# Altium PCB GC-Pcb.PcbDoc (part 2 of 3)
Units mm, origin at the board's own origin, x right, y up, seen from the top; angles counter-clockwise.
Board outline 75 x 40 mm, 4 copper layers (Top Copper, GND, PWR, Bottom Copper), stack 1.312 mm thick; 83 components, 62 nets, 306 pads, 137 vias.
Unrouted connection lines stored in the file: 2.
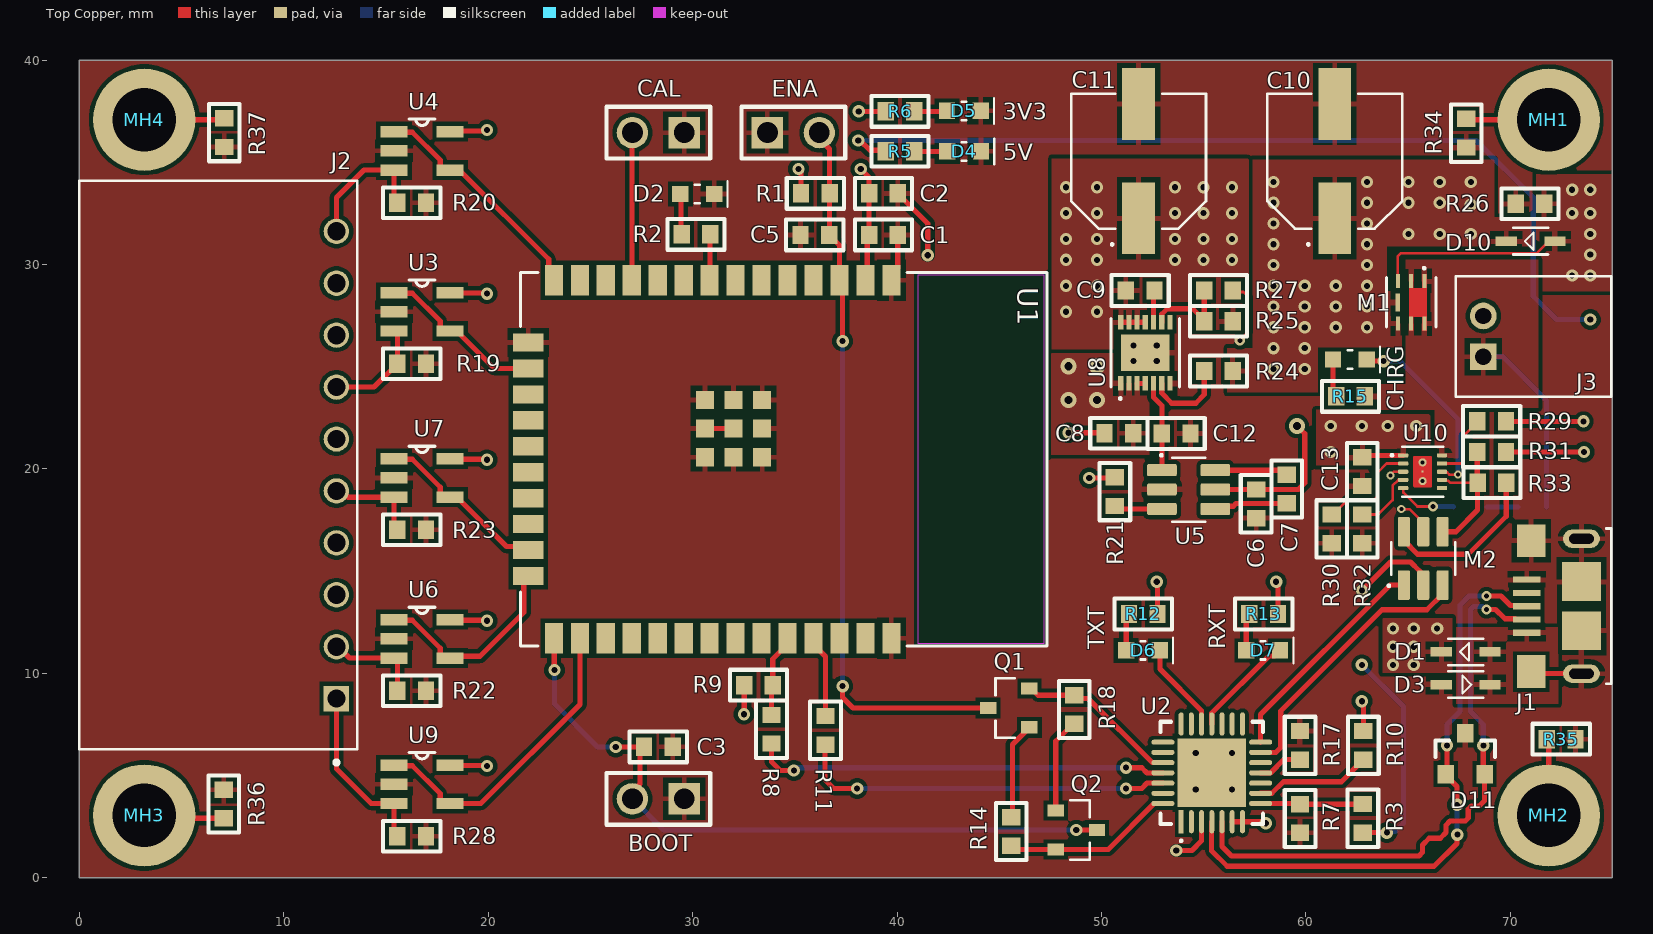
[diagram p0: Top Copper view]

## Part data (continued)
D11: library part D-SM05T1G, "Trans Voltage Suppressor Diode, 300W, 5V V(RWM), Unidirectional, 2 Element, Silicon, TO-236AB", Breakdown Voltage-Nom=6.7V, Clamping Voltage-Max=9.8V, Manufacturer="ON Semiconductor", Max Breakdown Voltage=7.3V, Max Operating Temperature=150°C, Max Power Dissipation=225mW, Min Breakdown Voltage=6.2V, Min Operating Temperature=-55°C, Non-rep Peak Rev Power Dis-Max=300W, Package Body Material=Plastic, Package Shape=Rectangular, Package Style="SMALL OUTLINEMeter", Peak Reflow Temperature (Cel)=260°C, Rep Pk Reverse Voltage-Max=5V, Supplier Part Number 1=4992673, Time @ Peak Reflow Temperature-Max (s)=40s, Category="ESD and Circuit Protection ICs", ComponentLink1description=https://datasheet.ciiva.com:443/pdfs/VipMasterIC/IC/ONSM/ONSM-S-A0006325830/ONSM-S-A0006325830-1.pdf?src-supplier=IHS+Markit, ComponentLink1URL=https://datasheet.ciiva.com:443/pdfs/VipMasterIC/IC/ONSM/ONSM-S-A0006325830/ONSM-S-A0006325830-1.pdf?src-supplier=IHS+Markit, ComponentLink2description=https://datasheet.ciiva.com/11193/sm12t1-d-11193492.pdf?src-supplier=Avnet, ComponentLink2URL=https://datasheet.ciiva.com/11193/sm12t1-d-11193492.pdf?src-supplier=Avnet, ComponentLink3Description=https://datasheet.ciiva.com/4508/sm12t1-d-196357-4508787.pdf?src-supplier=Mouser, ComponentLink3URL=https://datasheet.ciiva.com/4508/sm12t1-d-196357-4508787.pdf?src-supplier=Mouser, ComponentLink4Description=https://datasheet.ciiva.com/15143/getdatasheetpartid-69008-15143230.pdf?src-supplier=Verical, ComponentLink4URL=https://datasheet.ciiva.com/15143/getdatasheetpartid-69008-15143230.pdf?src-supplier=Verical, ComponentLink5Description=https://datasheet.ciiva.com/22661/1708353-22661174.pdf?src-supplier=Element14, ComponentLink5URL=https://datasheet.ciiva.com/22661/1708353-22661174.pdf?src-supplier=Element14, ComponentLink6Description=https://datasheet.ciiva.com/16199/sm12t1-d-16199269.pdf?src-supplier=Future+Electronics, ComponentLink6URL=https://datasheet.ciiva.com/16199/sm12t1-d-16199269.pdf?src-supplier=Future+Electronics, ComponentLink7Description=https://datasheet.ciiva.com/11193/sm12t1-d-11193495.pdf?src-supplier=Avnet, ComponentLink7URL=https://datasheet.ciiva.com/11193/sm12t1-d-11193495.pdf?src-supplier=Avnet, ComponentLink8Description=https://datasheet.ciiva.com/339/sm05t1-d-339929.pdf?src-supplier=Digikey, ComponentLink8URL=https://datasheet.ciiva.com/339/sm05t1-d-339929.pdf?src-supplier=Digikey, ComponentLink9Description=https://datasheet.ciiva.com/339/sm05t1-d-339930.pdf?src-supplier=Digikey, ComponentLink9URL=https://datasheet.ciiva.com/339/sm05t1-d-339930.pdf?src-supplier=Digikey, ComponentLink10Description=https://datasheet.ciiva.com/339/sm05t1-d-339928.pdf?src-supplier=Digikey, ComponentLink10URL=https://datasheet.ciiva.com/339/sm05t1-d-339928.pdf?src-supplier=Digikey, Diode Element Material=SILICON, Diode Type="TRANS VOLTAGE SUPPRESSOR", JEDEC-95 Code=TO-236AB, JESD-30 Code=R-PDSO-G3, JESD-609 Code=e3, Manufacturer Part Number=SM05T1G, Moisture Sensitivity Level=1, Number of Elements=2, Number of Pins=3, Polarity=Unidirectional, Pricing="3000=0.0553, 9000=0.0532, 15000=0.0523, 45000=0.0503, 75000=0.0486 (USD)", Qualification Status="Not Qualified", Reach SVHC Compliant=Yes, Reference Standard=IEC-61000-4-2, RoHS=Yes, RoHS Compliant=Yes, Stock=120000, Supplier 1="Future Electronics", Surface Mount=Yes, Technology=AVALANCHE, Terminal Finish=Tin, Terminal Form="Gull Wing", Terminal Position=DUAL
J1: library part J-10118193-0001LF, "FCI Right Angle Surface Mount Mount Female USB Connector; 100 V ac; 1.8A", Manufacturer="Amphenol ICC / FCI", Supplier Part Number 1=67T2259, Category="USB Connectors", ComponentLink1description=http://uk.rs-online.com/webdocs/1450/0900766b814507f1.pdf?src-supplier=Rs, ComponentLink1URL=http://uk.rs-online.com/webdocs/1450/0900766b814507f1.pdf?src-supplier=Rs, ComponentLink2description=https://cdn.amphenol-icc.com/media/wysiwyg/files/documentation/datasheet/inputoutput/io_usb_micro.pdf?src-supplier=Avnet, ComponentLink2URL=https://cdn.amphenol-icc.com/media/wysiwyg/files/documentation/datasheet/inputoutput/io_usb_micro.pdf?src-supplier=Avnet, ComponentLink3Description=https://cdn.amphenol-icc.com/media/wysiwyg/files/documentation/datasheet/inputoutput/io_usb_micro.pdf?src-supplier=Digikey, ComponentLink3URL=https://cdn.amphenol-icc.com/media/wysiwyg/files/documentation/datasheet/inputoutput/io_usb_micro.pdf?src-supplier=Digikey, ComponentLink4Description=https://datasheet.octopart.com/10118193-0001LF-Amphenol-Communications-Solutions-datasheet-96019471.pdf?src-supplier=Element14, ComponentLink4URL=https://datasheet.octopart.com/10118193-0001LF-Amphenol-Communications-Solutions-datasheet-96019471.pdf?src-supplier=Element14, ComponentLink5Description=https://cdn.amphenol-icc.com/media/wysiwyg/files/documentation/datasheet/inputoutput/io_usb_micro.pdf?src-supplier=Arrow+Electronics, ComponentLink5URL=https://cdn.amphenol-icc.com/media/wysiwyg/files/documentation/datasheet/inputoutput/io_usb_micro.pdf?src-supplier=Arrow+Electronics, ComponentLink6Description=https://cdn.amphenol-icc.com/media/wysiwyg/files/documentation/datasheet/inputoutput/io_usb_micro.pdf?src-supplier=Rs, ComponentLink6URL=https://cdn.amphenol-icc.com/media/wysiwyg/files/documentation/datasheet/inputoutput/io_usb_micro.pdf?src-supplier=Rs, ComponentLink7Description=https://cdn.amphenol-icc.com/media/wysiwyg/files/documentation/datasheet/inputoutput/io_usb_micro.pdf?src-supplier=Mouser, ComponentLink7URL=https://cdn.amphenol-icc.com/media/wysiwyg/files/documentation/datasheet/inputoutput/io_usb_micro.pdf?src-supplier=Mouser, ComponentLink8Description=https://cdn.amphenol-icc.com/media/wysiwyg/files/documentation/datasheet/inputoutput/io_usb_micro.pdf?src-supplier=Allied+Electronics, ComponentLink8URL=https://cdn.amphenol-icc.com/media/wysiwyg/files/documentation/datasheet/inputoutput/io_usb_micro.pdf?src-supplier=Allied+Electronics, ComponentLink9Description=http://www.amphenol-icc.com/media/wysiwyg/files/drawing/10118193.pdf?src-supplier=Digikey, ComponentLink9URL=http://www.amphenol-icc.com/media/wysiwyg/files/drawing/10118193.pdf?src-supplier=Digikey, ComponentLink10Description=https://cdn.amphenol-icc.com/media/wysiwyg/files/documentation/datasheet/inputoutput/io_usb_micro.pdf?src-supplier=Verical, ComponentLink10URL=https://cdn.amphenol-icc.com/media/wysiwyg/files/documentation/datasheet/inputoutput/io_usb_micro.pdf?src-supplier=Verical, ComponentLink11Description=https://cdn.amphenol-icc.com/media/wysiwyg/files/documentation/datasheet/inputoutput/io_usb_micro.pdf?src-supplier=Onlinecomponents.com, ComponentLink11URL=https://cdn.amphenol-icc.com/media/wysiwyg/files/documentation/datasheet/inputoutput/io_usb_micro.pdf?src-supplier=Onlinecomponents.com, ComponentLink12Description=https://datasheet.octopart.com/10118193-0001LF-Amphenol-Communications-Solutions-datasheet-55953155.pdf?src-supplier=TME, ComponentLink12URL=https://datasheet.octopart.com/10118193-0001LF-Amphenol-Communications-Solutions-datasheet-55953155.pdf?src-supplier=TME, ComponentLink13Description=https://cdn.amphenol-icc.com/media/wysiwyg/files/documentation/datasheet/inputoutput/io_usb_micro.pdf?src-supplier=TTI, ComponentLink13URL=https://cdn.amphenol-icc.com/media/wysiwyg/files/documentation/datasheet/inputoutput/io_usb_micro.pdf?src-supplier=TTI, ComponentLink14Description=https://datasheet.octopart.com/10118193-0001LF-Amphenol-Communications-Solutions-datasheet-11792339.pdf?src-supplier=Electro+Sonic, ComponentLink14URL=https://datasheet.octopart.com/10118193-0001LF-Amphenol-Communications-Solutions-datasheet-11792339.pdf?src-supplier=Electro+Sonic, ComponentLink15Description=https://cdn.amphenol-icc.com/media/wysiwyg/files/documentation/datasheet/inputoutput/io_usb_micro.pdf?src-supplier=Heilind+Electronics, ComponentLink15URL=https://cdn.amphenol-icc.com/media/wysiwyg/files/documentation/datasheet/inputoutput/io_usb_micro.pdf?src-supplier=Heilind+Electronics, Manufacturer Part Number=10118193-0001LF, Pricing="1=0.466, 25=0.361, 100=0.326, 250=0.312, 500=0.299 (USD)", RoHS=No, Stock=12269, Supplier 1=Avnet
J2: library part J-105314-1110, "Rectangular Power Connector, 10 Contact(s), Male, Solder Terminal", Manufacturer=Molex, Supplier Part Number 1=538-105314-1110, Category="Headers and Wire Housings", ComponentLink1description=https://www.molex.com:443/molex/products/datasheet.jsp?part=active%2f1053141110_PCB_HEADERS.xml&src-supplier=IHS+Markit, ComponentLink1URL=https://www.molex.com:443/molex/products/datasheet.jsp?part=active%2f1053141110_PCB_HEADERS.xml&src-supplier=IHS+Markit, ComponentLink2description=https://www.molex.com/pdm_docs/ps/PS-105300-100-001.pdf?src-supplier=Digikey, ComponentLink2URL=https://www.molex.com/pdm_docs/ps/PS-105300-100-001.pdf?src-supplier=Digikey, Connector Type=Power,Rectangular, Manufacturer Part Number=105314-1110, Pricing="1=2.31, 10=1.96, 50=1.96, 100=1.72, 1000=1.37, 10000=1.2 (USD)", Reach SVHC Compliant=Yes, RoHS=Yes, RoHS Compliant=Yes, Stock=2000, Supplier 1=Mouser
J3: library part J-S2B-PH-K-S(LF)(SN), "Header for PCB; pitch 2.00mm; 2-contacts; THT; male; side entry; 100V/2A", Manufacturer=JST, Manufacturer Part Number=S2B-PH-K-S(LF)(SN), Category="Headers and Wire Housings", ComponentLink1description=https://datasheet.ciiva.com/11747/0900766b8082f558-11747128.pdf?src-supplier=Rs, ComponentLink1URL=https://datasheet.ciiva.com/11747/0900766b8082f558-11747128.pdf?src-supplier=Rs, ComponentLink2description=https://datasheet.ciiva.com/712/eph-712447.pdf?src-supplier=Digikey, ComponentLink2URL=https://datasheet.ciiva.com/712/eph-712447.pdf?src-supplier=Digikey, ComponentLink3Description=https://datasheet.ciiva.com/16484/s2b-ph-k-slfsn-16484405.pdf?src-supplier=Future+Electronics, ComponentLink3URL=https://datasheet.ciiva.com/16484/s2b-ph-k-slfsn-16484405.pdf?src-supplier=Future+Electronics, ComponentLink4Description=https://datasheet.ciiva.com/8052/80564-8052207.pdf?src-supplier=Element14, ComponentLink4URL=https://datasheet.ciiva.com/8052/80564-8052207.pdf?src-supplier=Element14, ComponentLink5Description=https://datasheet.ciiva.com/26894/getdatasheetpartid-641020-26894599.pdf?src-supplier=Verical, ComponentLink5URL=https://datasheet.ciiva.com/26894/getdatasheetpartid-641020-26894599.pdf?src-supplier=Verical, Pricing="1=0.1318, 10=0.1056, 25=0.1046, 50=0.1034, 100=0.0672, 1000=0.0499 (USD)", RoHS=Yes, Stock=48365, Supplier 1="Arrow Electronics", Supplier Part Number 1=S2B-PH-K-S(LF)(SN)
M1: library part M-SIA427ADJ-T1-GE3, "Power Field-Effect Transistor, 12A I(D), 8V, 0.016ohm, 1-Element, P-Channel, Silicon, Metal-oxide Semiconductor FET", Drain Current-Max (Abs) (ID)=12A, Manufacturer="Vishay Siliconix", Max Operating Temperature=150°C, Power Dissipation-Max (Abs)=19W, Supplier Part Number 1=78-SIA427ADJ-T1-GE3, Category=MOSFETs, ComponentLink1description=https://datasheet.ciiva.com:443/pdfs/VipMasterIC/IC/VISH/VISH-S-A0001142626/VISH-S-A0001142626-1.pdf?src-supplier=IHS+Markit, ComponentLink1URL=https://datasheet.ciiva.com:443/pdfs/VipMasterIC/IC/VISH/VISH-S-A0001142626/VISH-S-A0001142626-1.pdf?src-supplier=IHS+Markit, ComponentLink2description=http://www.farnell.com/datasheets/2614535.pdf?src-supplier=Farnell, ComponentLink2URL=http://www.farnell.com/datasheets/2614535.pdf?src-supplier=Farnell, ComponentLink3Description=http://www.mouser.com/ds/2/427/sia427adj-537173.pdf?src-supplier=Mouser, ComponentLink3URL=http://www.mouser.com/ds/2/427/sia427adj-537173.pdf?src-supplier=Mouser, ComponentLink4Description=http://www.vishay.com/docs/63651/sia427adj.pdf?src-supplier=Digikey, ComponentLink4URL=http://www.vishay.com/docs/63651/sia427adj.pdf?src-supplier=Digikey, ComponentLink5Description=http://www.vishay.com/docs/63651/sia427adj.pdf?src-supplier=Avnet, ComponentLink5URL=http://www.vishay.com/docs/63651/sia427adj.pdf?src-supplier=Avnet, ComponentLink6Description=http://www.farnell.com/datasheets/2614535.pdf?src-supplier=Element14, ComponentLink6URL=http://www.farnell.com/datasheets/2614535.pdf?src-supplier=Element14, ComponentLink7Description=http://www.farnell.com/datasheets/2614535.pdf?src-supplier=Newark, ComponentLink7URL=http://www.farnell.com/datasheets/2614535.pdf?src-supplier=Newark, FET Technology="METAL-OXIDE SEMICONDUCTOR", JESD-609 Code=e3, Manufacturer Part Number=SIA427ADJ-T1-GE3, Polarity/Channel Type=P-CHANNEL, Pricing="1=0.53, 10=0.455, 50=0.455, 100=0.34, 1000=0.207, 10000=0.158 (USD)", Reach SVHC Compliant=Yes, RoHS=Yes, RoHS Compliant=Yes, Stock=63429, Supplier 1=Mouser, Surface Mount=Yes, Terminal Finish=Tin
M2: library part M-FDC6561AN, "Small Signal Field-Effect Transistor, 2.5A I(D), 30V, 2-Element, N-Channel, Silicon, Metal-oxide Semiconductor FET", Drain Current-Max (Abs) (ID)=2.5A, Drain-source On Resistance-Max=95mR, DS Breakdown Voltage-Min=30V, Manufacturer="ON Semiconductor / Fairchild", Max Operating Temperature=150°C, Operating Mode="ENHANCEMENT MODE", Package Body Material=Plastic, Package Shape=Rectangular, Package Style="SMALL OUTLINEMeter", Power Dissipation-Max (Abs)=960mW, Supplier Part Number 1=1119379, Category=MOSFETs, ComponentLink1description=https://datasheet.ciiva.com:443/pdfs/VipMasterIC/IC/ONSM/ONSM-S-A0003579719/ONSM-S-A0003579719-1.pdf?src-supplier=IHS+Markit, ComponentLink1URL=https://datasheet.ciiva.com:443/pdfs/VipMasterIC/IC/ONSM/ONSM-S-A0003579719/ONSM-S-A0003579719-1.pdf?src-supplier=IHS+Markit, ComponentLink2description=https://datasheet.ciiva.com/1252/11844-1252600.pdf?src-supplier=Newark, ComponentLink2URL=https://datasheet.ciiva.com/1252/11844-1252600.pdf?src-supplier=Newark, ComponentLink3Description=https://datasheet.ciiva.com/928/fdc6561an-928038.pdf?src-supplier=Digikey, ComponentLink3URL=https://datasheet.ciiva.com/928/fdc6561an-928038.pdf?src-supplier=Digikey, ComponentLink4Description=https://datasheet.ciiva.com/928/fdc6561an-928039.pdf?src-supplier=Digikey, ComponentLink4URL=https://datasheet.ciiva.com/928/fdc6561an-928039.pdf?src-supplier=Digikey, ComponentLink5Description=https://datasheet.ciiva.com/928/fdc6561an-928040.pdf?src-supplier=Digikey, ComponentLink5URL=https://datasheet.ciiva.com/928/fdc6561an-928040.pdf?src-supplier=Digikey, ComponentLink6Description=https://datasheet.ciiva.com/8114/fdc6561an-8114955.pdf?src-supplier=Avnet, ComponentLink6URL=https://datasheet.ciiva.com/8114/fdc6561an-8114955.pdf?src-supplier=Avnet, ComponentLink7Description=https://datasheet.ciiva.com/22655/11844-22655279.pdf?src-supplier=Element14, ComponentLink7URL=https://datasheet.ciiva.com/22655/11844-22655279.pdf?src-supplier=Element14, ComponentLink8Description=https://datasheet.ciiva.com/22681/11844-22681868.pdf?src-supplier=Element14, ComponentLink8URL=https://datasheet.ciiva.com/22681/11844-22681868.pdf?src-supplier=Element14, ComponentLink9Description=https://datasheet.ciiva.com/22681/11844-22681869.pdf?src-supplier=Element14, ComponentLink9URL=https://datasheet.ciiva.com/22681/11844-22681869.pdf?src-supplier=Element14, Drain Current-Max (ID)=2.5A, FET Technology="METAL-OXIDE SEMICONDUCTOR", JESD-30 Code=R-PDSO-G6, Manufacturer Part Number=FDC6561AN, Moisture Sensitivity Level=1, Number of Elements=2, Number of Pins=6, Polarity/Channel Type=N-CHANNEL, Pricing="3000=0.215, 6000=0.21, 9000=0.205, 12000=0.205, 15000=0.2 (USD)", Qualification Status="Not Qualified", Reach SVHC Compliant=Yes, RoHS=Yes, RoHS Compliant=Yes, Stock=60000, Supplier 1="Future Electronics", Surface Mount=Yes, Terminal Form="Gull Wing", Terminal Position=DUAL, Transistor Application=SWITCHING, Transistor Element Material=SILICON
Q1 Q2: library part Q-SS8050-G, "Small Signal Bipolar Transistor, 1.5A I(C), 25V V(BR)CEO, 1-Element, NPN, Silicon", Manufacturer=Comchip, Supplier Part Number 1=641-1790-1-ND, Category=Transistors, ComponentLink1description=https://datasheet.ciiva.com:443/pdfs/VipMasterIC/IC/COMC/COMC-S-A0004994192/COMC-S-A0004994192-1.pdf?src-supplier=IHS+Markit, ComponentLink1URL=https://datasheet.ciiva.com:443/pdfs/VipMasterIC/IC/COMC/COMC-S-A0004994192/COMC-S-A0004994192-1.pdf?src-supplier=IHS+Markit, ComponentLink2description="http://www.comchiptech.com/admin/files/product/SS8050-G RevA181526.pdf?src-supplier=Digikey", ComponentLink2URL="http://www.comchiptech.com/admin/files/product/SS8050-G RevA181526.pdf?src-supplier=Digikey", Manufacturer Part Number=SS8050-G, Pricing="1=0.29, 10=0.2, 100=0.0978, 500=0.08154, 1000=0.05666 (USD)", Reach SVHC Compliant=Yes, RoHS=Yes, RoHS Compliant=Yes, Stock=178560, Supplier 1=Digikey
R1: "Fixed Resistor, Metal Glaze/thick Film, 0.1W, 10000ohm, 75V, 1% +/-Tol, 100ppm/Cel, Surface Mount, 0603", Manufacturer=Yageo, Max Operating Temperature=155°C, Min Operating Temperature=-55°C, Package Height=0.45mm, Package Length=1.6mm, Package Shape=Rectangular, Package Style=SMTMeter, Package Width=0.8mm, Rated Power Dissipation (P)=100mW, Rated Temperature=70°C, Resistance=10kR, Resistor Type="FIXED RESISTOR", Temperature Coefficient=100ppm/°C, Tolerance=1%, Working Voltage=75V, Additional Feature="LASER TRIMMABLE", Category="Chip SMD Resistors", ComponentLink1description=https://datasheet.ciiva.com:443/pdfs/VipMasterIC/IC/YAGO/YAGO-S-A0003597364/YAGO-S-A0003597364-1.pdf?src-supplier=IHS+Markit, ComponentLink1URL=https://datasheet.ciiva.com:443/pdfs/VipMasterIC/IC/YAGO/YAGO-S-A0003597364/YAGO-S-A0003597364-1.pdf?src-supplier=IHS+Markit, ComponentLink2description=https://datasheet.octopart.com/AC0603FR-1310KL-Yageo-datasheet-166720450.pdf?src-supplier=Future+Electronics, ComponentLink2URL=https://datasheet.octopart.com/AC0603FR-1310KL-Yageo-datasheet-166720450.pdf?src-supplier=Future+Electronics, Construction=Chip, JESD-609 Code=e3, Manufacturer Part Number=AC0603FR-1310KL, Mount="Surface Mount", Number of Pins=2, Packaging="Tape and Reel", Pricing="20000=0.00167 (USD)", Reach SVHC Compliant=Yes, Reference Standard=AEC-Q200, RoHS=Yes, RoHS Compliant=Yes, Size Code=0603, Stock=60000, Supplier 1=Avnet, Supplier Part Number 1=AC0603FR-1310KL, Technology="METAL GLAZE/THICK FILM", Terminal Finish=Nickel, Termination=Wraparound
R2 R5 R6 R12 R13: "Fixed Resistor, Metal Glaze/thick Film, 0.1W, 220ohm, 75V, 5% +/-Tol, 200ppm/Cel, Surface Mount, 0603", Manufacturer="Stackpole Electronics", Manufacturer Part Number=RMCF0603JT220R, Max Operating Temperature=155°C, Min Operating Temperature=-55°C, Package Height=0.45mm, Package Length=1.55mm, Package Shape=Rectangular, Package Style=SMTMeter, Package Width=0.8mm, Rated Power Dissipation (P)=100mW, Rated Temperature=70°C, Resistance=220R, Resistor Type="FIXED RESISTOR", Temperature Coefficient=200ppm/°C, Tolerance=5%, Working Voltage=75V, Category="Chip SMD Resistors", ComponentLink1description=https://datasheet.ciiva.com:443/pdfs/VipMasterIC/IC/SEIE/SEIE-S-A0009541969/SEIE-S-A0009541969-1.pdf?src-supplier=IHS+Markit, ComponentLink1URL=https://datasheet.ciiva.com:443/pdfs/VipMasterIC/IC/SEIE/SEIE-S-A0009541969/SEIE-S-A0009541969-1.pdf?src-supplier=IHS+Markit, ComponentLink2description=https://datasheet.ciiva.com/26835/getdatasheetpartid-362043-26835658.pdf?src-supplier=Verical, ComponentLink2URL=https://datasheet.ciiva.com/26835/getdatasheetpartid-362043-26835658.pdf?src-supplier=Verical, Construction=Rectangular, JESD-609 Code=e3, Mount="Surface Mount", Number of Pins=2, Packaging="Tape and Reel", Pricing="5000=0.00126, 10000=0.00124, 20000=0.00122, 30000=0.00121, 40000=0.00119, 50000=0.00117, 500000=0.00115 (USD)", Reach SVHC Compliant=Yes, Reference Standard=AEC-Q200, RoHS=Yes, RoHS Compliant=Yes, Size Code=0603, Stock=5000, Supplier 1=Avnet, Supplier Part Number 1=RMCF0603JT220R, Technology="METAL GLAZE/THICK FILM", Terminal Finish=Nickel, Termination=Wraparound
R3: library part R-RMCF0603FT22K1, "Fixed Resistor, Metal Glaze/thick Film, 0.1W, 22100ohm, 75V, 1% +/-Tol, 100ppm/Cel, Surface Mount, 0603", Manufacturer="Stackpole Electronics", Max Operating Temperature=155°C, Min Operating Temperature=-55°C, Package Height=0.45mm, Package Length=1.55mm, Package Shape=Rectangular, Package Style=SMTMeter, Package Width=0.8mm, Rated Power Dissipation (P)=100mW, Rated Temperature=70°C, Resistance=22.1kR, Resistor Type="FIXED RESISTOR", Supplier Part Number 1=RMCF0603FT22K1CT-ND, Temperature Coefficient=100ppm/°C, Tolerance=1%, Working Voltage=75V, Category="Chip SMD Resistors", ComponentLink1description=https://datasheet.ciiva.com:443/pdfs/VipMasterIC/IC/SEIE/SEIE-S-A0009541969/SEIE-S-A0009541969-1.pdf?src-supplier=IHS+Markit, ComponentLink1URL=https://datasheet.ciiva.com:443/pdfs/VipMasterIC/IC/SEIE/SEIE-S-A0009541969/SEIE-S-A0009541969-1.pdf?src-supplier=IHS+Markit, ComponentLink2description=http://components.arrow.com/part/dataview/40960961S7171997N1174?src-supplier=Arrow+Electronics, ComponentLink2URL=http://components.arrow.com/part/dataview/40960961S7171997N1174?src-supplier=Arrow+Electronics, ComponentLink3Description=https://datasheet.octopart.com/RMCF0603FT22K1-Stackpole-Electronics-datasheet-11547379.pdf?src-supplier=Future+Electronics, ComponentLink3URL=https://datasheet.octopart.com/RMCF0603FT22K1-Stackpole-Electronics-datasheet-11547379.pdf?src-supplier=Future+Electronics, ComponentLink4Description=https://www.seielect.com/catalog/SEI-RMCF_RMCP.pdf?src-supplier=Avnet, ComponentLink4URL=https://www.seielect.com/catalog/SEI-RMCF_RMCP.pdf?src-supplier=Avnet, ComponentLink5Description=http://www.seielect.com/Catalog/SEI-RMC.pdf?src-supplier=Future+Electronics, ComponentLink5URL=http://www.seielect.com/Catalog/SEI-RMC.pdf?src-supplier=Future+Electronics, ComponentLink6Description=https://www.verical.com/server-webapp/html/getDatasheet?partID=375344&src-supplier=Verical, ComponentLink6URL=https://www.verical.com/server-webapp/html/getDatasheet?partID=375344&src-supplier=Verical, ComponentLink7Description=https://www.seielect.com/catalog/SEI-Packaging.pdf?src-supplier=Digikey, ComponentLink7URL=https://www.seielect.com/catalog/SEI-Packaging.pdf?src-supplier=Digikey, ComponentLink8Description=https://www.seielect.com/Catalog/SEI-RMCF_RMCP.pdf?src-supplier=Digikey, ComponentLink8URL=https://www.seielect.com/Catalog/SEI-RMCF_RMCP.pdf?src-supplier=Digikey, Construction=Rectangular, JESD-609 Code=e3, Manufacturer Part Number=RMCF0603FT22K1, Mount="Surface Mount", Number of Pins=2, Packaging="Tape and Reel", Pricing="1=0.1, 10=0.015, 50=0.009, 100=0.0075, 500=0.00498, 1000=0.00425 (USD)", Reach SVHC Compliant=Yes, Reference Standard=AEC-Q200, RoHS=Yes, RoHS Compliant=Yes, Size Code=0603, Stock=1223163, Supplier 1=Digikey, Technology="METAL GLAZE/THICK FILM", Terminal Finish=Nickel, Termination=Wraparound
R7: library part R-RC0402FR-0747K5L, "Fixed Resistor, Metal Glaze/thick Film, 0.0625W, 47500ohm, 50V, 1% +/-Tol, 100ppm/Cel, Surface Mount, 0402", Manufacturer=Yageo, Max Operating Temperature=155°C, Min Operating Temperature=-55°C, Package Height=0.35mm, Package Length=1mm, Package Shape=Rectangular, Package Style=SMTMeter, Package Width=0.5mm, Rated Power Dissipation (P)=62.5mW, Rated Temperature=70°C, Resistance=47.5kR, Resistor Type="FIXED RESISTOR", Supplier Part Number 1=1462183, Temperature Coefficient=100ppm/°C, Tolerance=1%, Working Voltage=50V, Additional Feature="LASER TRIMMABLE", Category="Chip SMD Resistors", ComponentLink1description=https://datasheet.ciiva.com:443/pdfs/VipMasterIC/IC/YAGO/YAGO-S-A0008145938/YAGO-S-A0008145938-1.pdf?src-supplier=IHS+Markit, ComponentLink1URL=https://datasheet.ciiva.com:443/pdfs/VipMasterIC/IC/YAGO/YAGO-S-A0008145938/YAGO-S-A0008145938-1.pdf?src-supplier=IHS+Markit, ComponentLink2description=https://datasheet.ciiva.com/46394/1018594-46394942.pdf?src-supplier=Element14, ComponentLink2URL=https://datasheet.ciiva.com/46394/1018594-46394942.pdf?src-supplier=Element14, ComponentLink3Description=https://datasheet.ciiva.com/12667/pyu-rc0402-51-rohs-l-6-r-12667103.pdf?src-supplier=Mouser, ComponentLink3URL=https://datasheet.ciiva.com/12667/pyu-rc0402-51-rohs-l-6-r-12667103.pdf?src-supplier=Mouser, ComponentLink4Description=https://datasheet.ciiva.com/16746/pyu-rc0402-51-rohs-l-6-r-16746316.pdf?src-supplier=Future+Electronics, ComponentLink4URL=https://datasheet.ciiva.com/16746/pyu-rc0402-51-rohs-l-6-r-16746316.pdf?src-supplier=Future+Electronics, Construction=Chip, JESD-609 Code=e3, Manufacturer Part Number=RC0402FR-0747K5L, Mount="Surface Mount", Number of Pins=2, Packaging="Tape and Reel", Pricing="10000=0.0012, 100000=0.0011, 300000=0.001, 750000=0.001, 2000000=0.0009 (USD)", Reach SVHC Compliant=Yes, RoHS=Yes, RoHS Compliant=Yes, Size Code=0402, Stock=1410000, Supplier 1="Future Electronics", Technology="METAL GLAZE/THICK FILM", Terminal Finish=Nickel, Termination=Wraparound
R8 R11 R34 R35 R36 R37: library part R-ERJ-3GEY0R00V, "Fixed Resistor, Metal Glaze/thick Film, 0.1W, 0ohm, Surface Mount, 0603", Manufacturer=Panasonic, Max Operating Temperature=155°C, Min Operating Temperature=-55°C, Package Height=0.45mm, Package Length=1.6mm, Package Shape=Rectangular, Package Style=SMTMeter, Package Width=0.8mm, Rated Power Dissipation (P)=100mW, Rated Temperature=70°C, Resistance=0R, Resistor Type="FIXED RESISTOR", Supplier Part Number 1=667-ERJ-3GEY0R00V, Category="Chip SMD Resistors", ComponentLink1description=https://datasheet.ciiva.com:443/pdfs/VipMasterIC/IC/PANA/PANA-S-A0009459603/PANA-S-A0009459603-1.pdf?src-supplier=IHS+Markit, ComponentLink1URL=https://datasheet.ciiva.com:443/pdfs/VipMasterIC/IC/PANA/PANA-S-A0009459603/PANA-S-A0009459603-1.pdf?src-supplier=IHS+Markit, ComponentLink2description=https://datasheet.ciiva.com/27055/1935748-27055113.pdf?src-supplier=Jameco, ComponentLink2URL=https://datasheet.ciiva.com/27055/1935748-27055113.pdf?src-supplier=Jameco, ComponentLink3Description=https://datasheet.ciiva.com/11808/0900766b80f806dd-11808207.pdf?src-supplier=Rs, ComponentLink3URL=https://datasheet.ciiva.com/11808/0900766b80f806dd-11808207.pdf?src-supplier=Rs, ComponentLink4Description=https://datasheet.ciiva.com/48532/aoa0000ce1-48532165.pdf?src-supplier=Avnet, ComponentLink4URL=https://datasheet.ciiva.com/48532/aoa0000ce1-48532165.pdf?src-supplier=Avnet, ComponentLink5Description=https://datasheet.ciiva.com/43460/1678796-43460647.pdf?src-supplier=Farnell, ComponentLink5URL=https://datasheet.ciiva.com/43460/1678796-43460647.pdf?src-supplier=Farnell, ComponentLink6Description=https://datasheet.ciiva.com/5959/1678796-5959707.pdf?src-supplier=Farnell, ComponentLink6URL=https://datasheet.ciiva.com/5959/1678796-5959707.pdf?src-supplier=Farnell, ComponentLink7Description=https://datasheet.ciiva.com/46377/1678796-46377868.pdf?src-supplier=Element14, ComponentLink7URL=https://datasheet.ciiva.com/46377/1678796-46377868.pdf?src-supplier=Element14, ComponentLink8Description=https://datasheet.ciiva.com/28695/1678796-28695833.pdf?src-supplier=Element14, ComponentLink8URL=https://datasheet.ciiva.com/28695/1678796-28695833.pdf?src-supplier=Element14, ComponentLink9Description=https://datasheet.ciiva.com/16758/70255313-16758527.pdf?src-supplier=Allied+Electronics, ComponentLink9URL=https://datasheet.ciiva.com/16758/70255313-16758527.pdf?src-supplier=Allied+Electronics, ComponentLink10Description=https://datasheet.ciiva.com/9198/aoa0000ce1-9198975.pdf?src-supplier=Avnet, ComponentLink10URL=https://datasheet.ciiva.com/9198/aoa0000ce1-9198975.pdf?src-supplier=Avnet, ComponentLink11Description=https://datasheet.ciiva.com/16834/aoa0000ce1-16834828.pdf?src-supplier=Future+Electronics, ComponentLink11URL=https://datasheet.ciiva.com/16834/aoa0000ce1-16834828.pdf?src-supplier=Future+Electronics, ComponentLink12Description=https://datasheet.ciiva.com/30199/4aoa0000ce1-30199822.pdf?src-supplier=Onlinecomponents.com, ComponentLink12URL=https://datasheet.ciiva.com/30199/4aoa0000ce1-30199822.pdf?src-supplier=Onlinecomponents.com, Construction=Rectangular, JESD-609 Code=e3, Manufacturer Part Number=ERJ-3GEY0R00V, Mount="Surface Mount", Number of Pins=2, Packaging="Tape and Reel", Pricing="1=0.1, 10=0.021, 50=0.021, 100=0.01, 1000=0.007, 10000=0.004 (USD)", Reach SVHC Compliant=Yes, Reference Standard=AEC-Q200, RoHS=Yes, RoHS Compliant=Yes, Size Code=0603, Stock=7345218, Supplier 1=Mouser, Technology="METAL GLAZE/THICK FILM", Terminal Finish=Nickel, Termination=Wraparound
R9 R14 R17 R18 R21 R24 R29: library part R-AC0603FR-1310KL, "Fixed Resistor, Metal Glaze/thick Film, 0.1W, 10000ohm, 75V, 1% +/-Tol, 100ppm/Cel, Surface Mount, 0603", Manufacturer=Yageo, Max Operating Temperature=155°C, Min Operating Temperature=-55°C, Package Height=0.45mm, Package Length=1.6mm, Package Shape=Rectangular, Package Style=SMTMeter, Package Width=0.8mm, Rated Power Dissipation (P)=100mW, Rated Temperature=70°C, Resistance=10kR, Resistor Type="FIXED RESISTOR", Temperature Coefficient=100ppm/°C, Tolerance=1%, Working Voltage=75V, Additional Feature="LASER TRIMMABLE", Category="Chip SMD Resistors", ComponentLink1description=https://datasheet.ciiva.com:443/pdfs/VipMasterIC/IC/YAGO/YAGO-S-A0003597364/YAGO-S-A0003597364-1.pdf?src-supplier=IHS+Markit, ComponentLink1URL=https://datasheet.ciiva.com:443/pdfs/VipMasterIC/IC/YAGO/YAGO-S-A0003597364/YAGO-S-A0003597364-1.pdf?src-supplier=IHS+Markit, ComponentLink2description=https://datasheet.octopart.com/AC0603FR-1310KL-Yageo-datasheet-166720450.pdf?src-supplier=Future+Electronics, ComponentLink2URL=https://datasheet.octopart.com/AC0603FR-1310KL-Yageo-datasheet-166720450.pdf?src-supplier=Future+Electronics, Construction=Chip, JESD-609 Code=e3, Manufacturer Part Number=AC0603FR-1310KL, Mount="Surface Mount", Number of Pins=2, Packaging="Tape and Reel", Pricing="20000=0.00167 (USD)", Reach SVHC Compliant=Yes, Reference Standard=AEC-Q200, RoHS=Yes, RoHS Compliant=Yes, Size Code=0603, Stock=60000, Supplier 1=Avnet, Supplier Part Number 1=AC0603FR-1310KL, Technology="METAL GLAZE/THICK FILM", Terminal Finish=Nickel, Termination=Wraparound